# Altium PCB PCB1.PcbDoc
Units mm, origin at the board's own origin, x right, y up, seen from the top; angles counter-clockwise.
Board outline 38 x 55 mm, 2 copper layers (Top Layer, Bottom Layer); 11 components, 17 nets, 82 pads, 237 vias.
Unrouted connection lines stored in the file: 35.
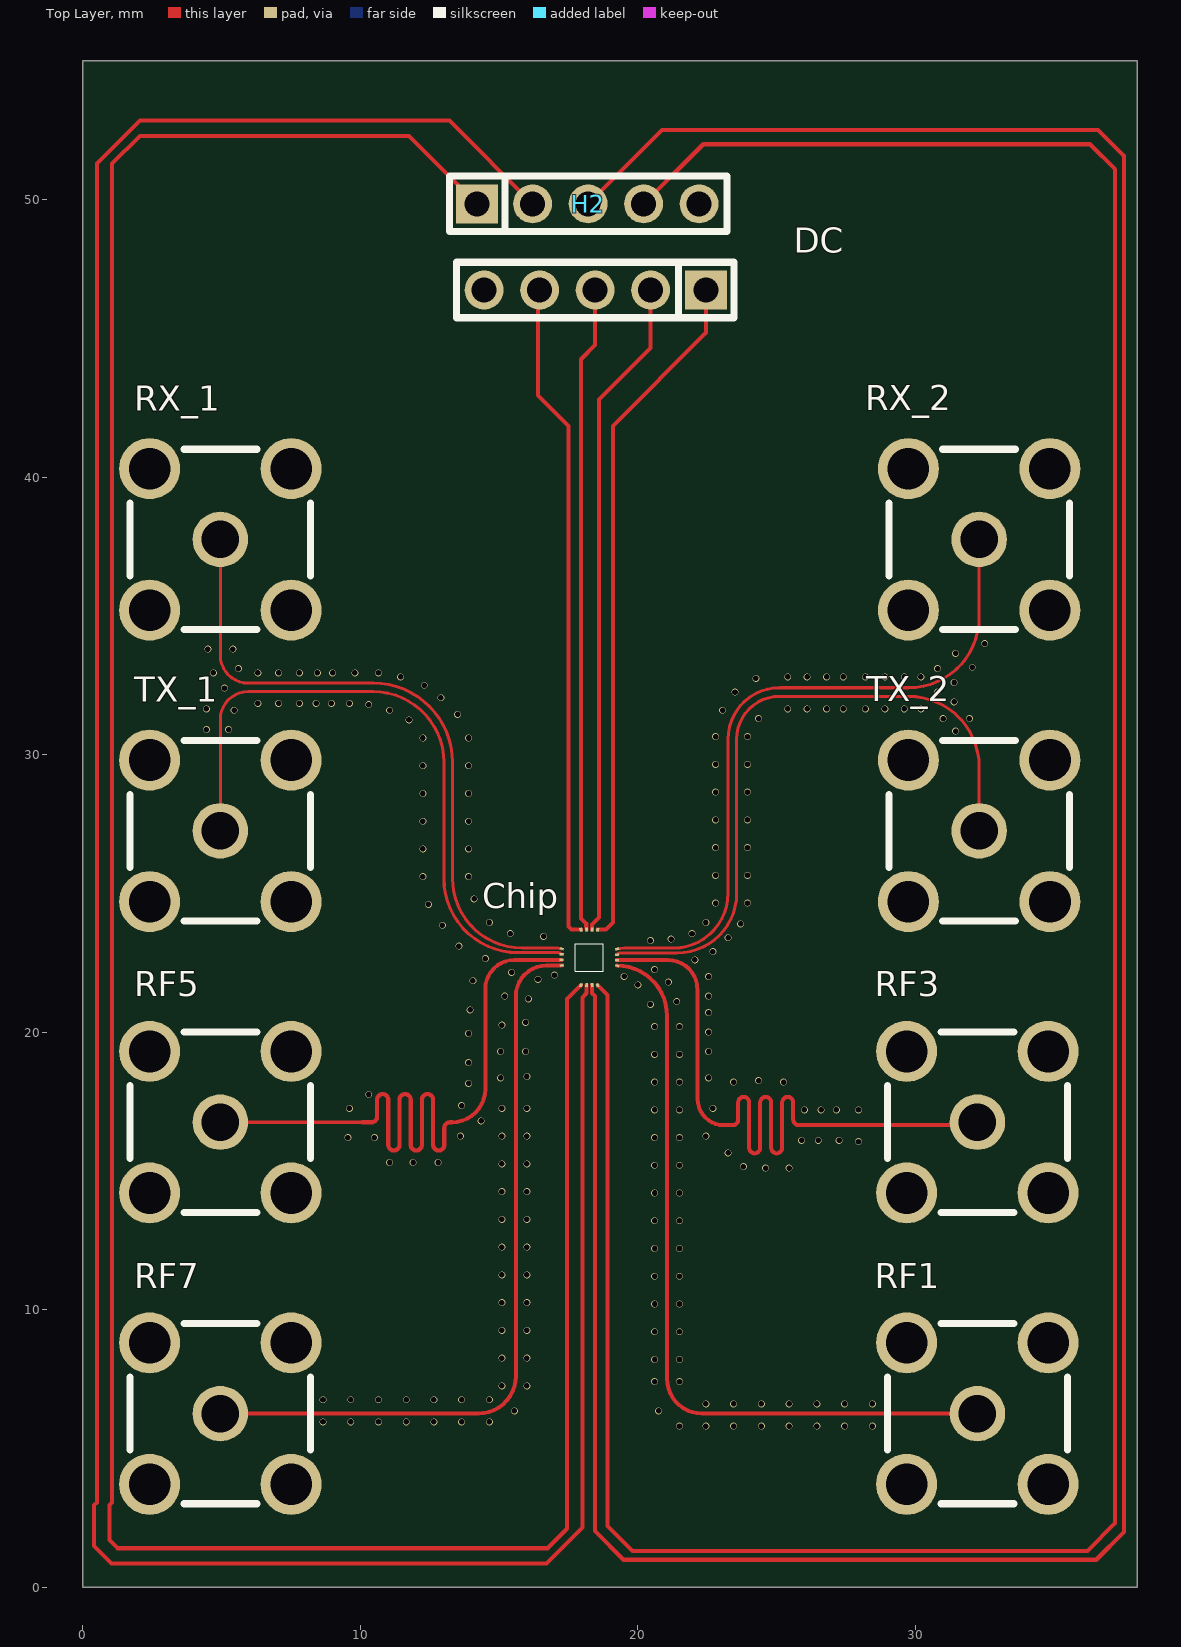
[diagram p0: Top Layer view]
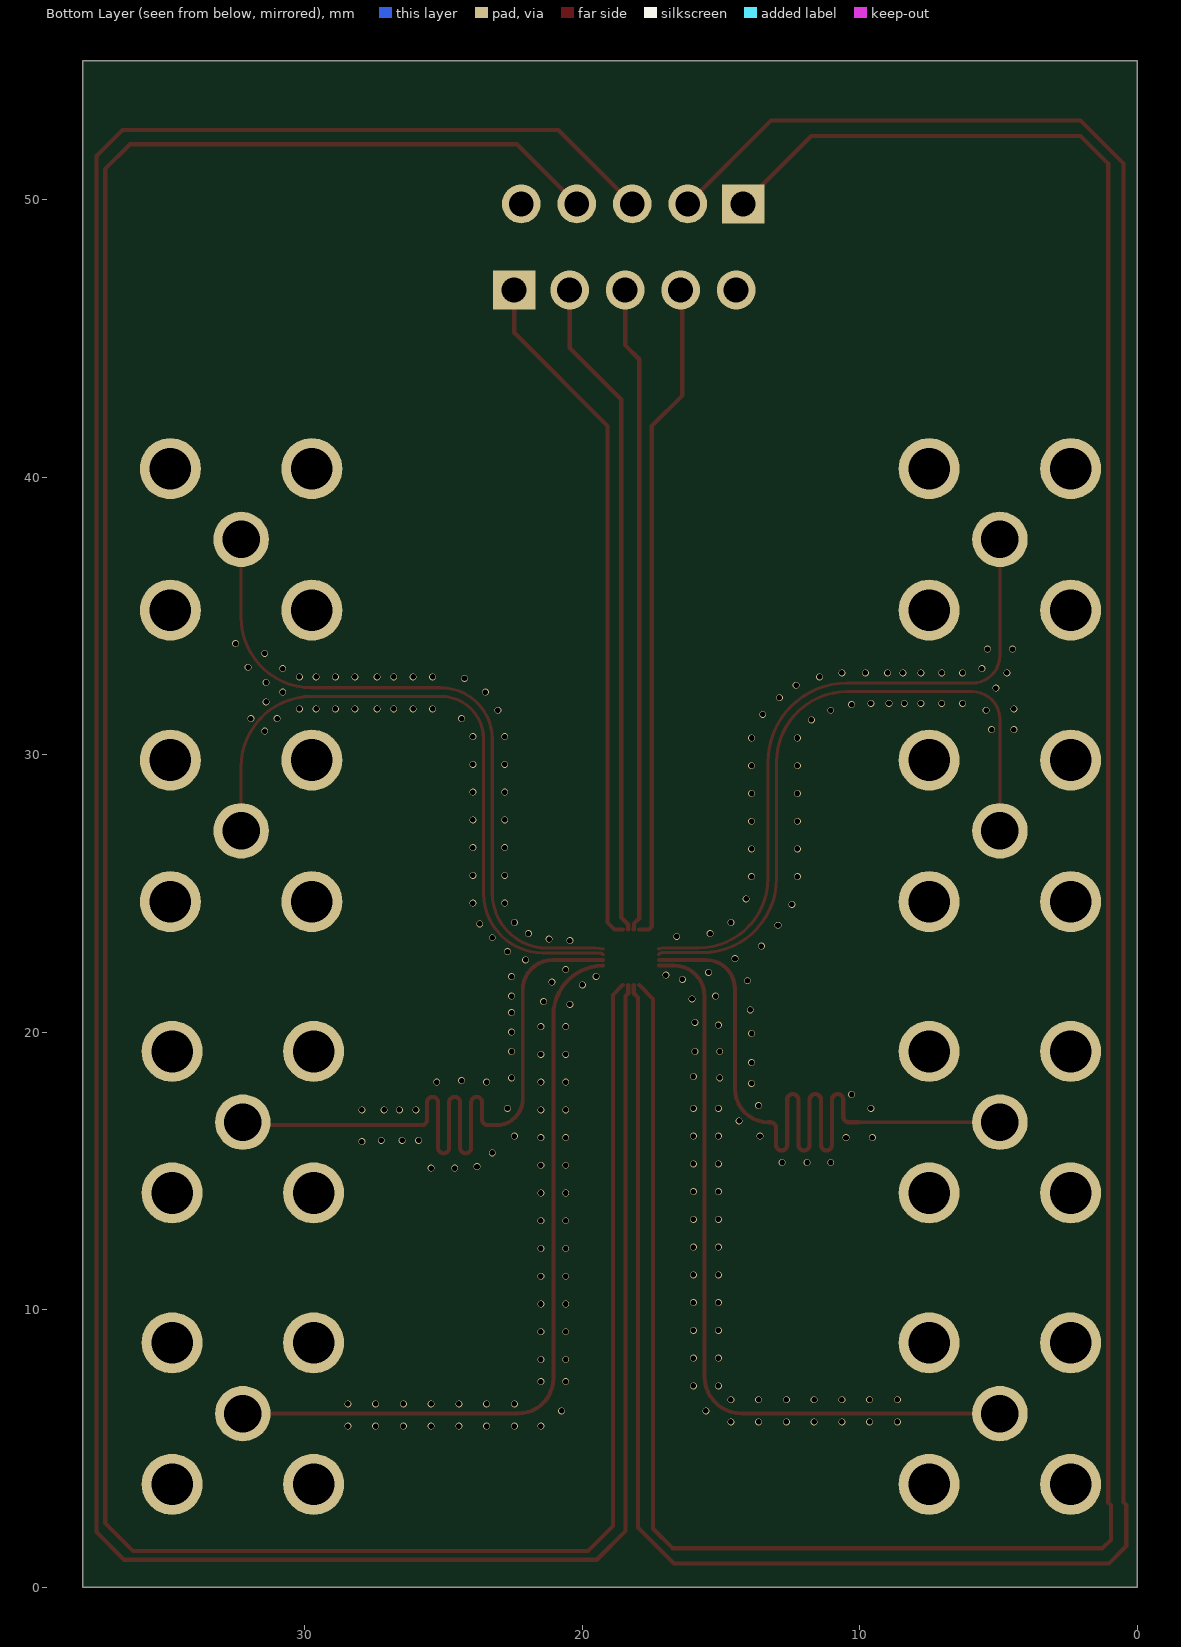
[diagram p1: Bottom Layer view, seen from below]
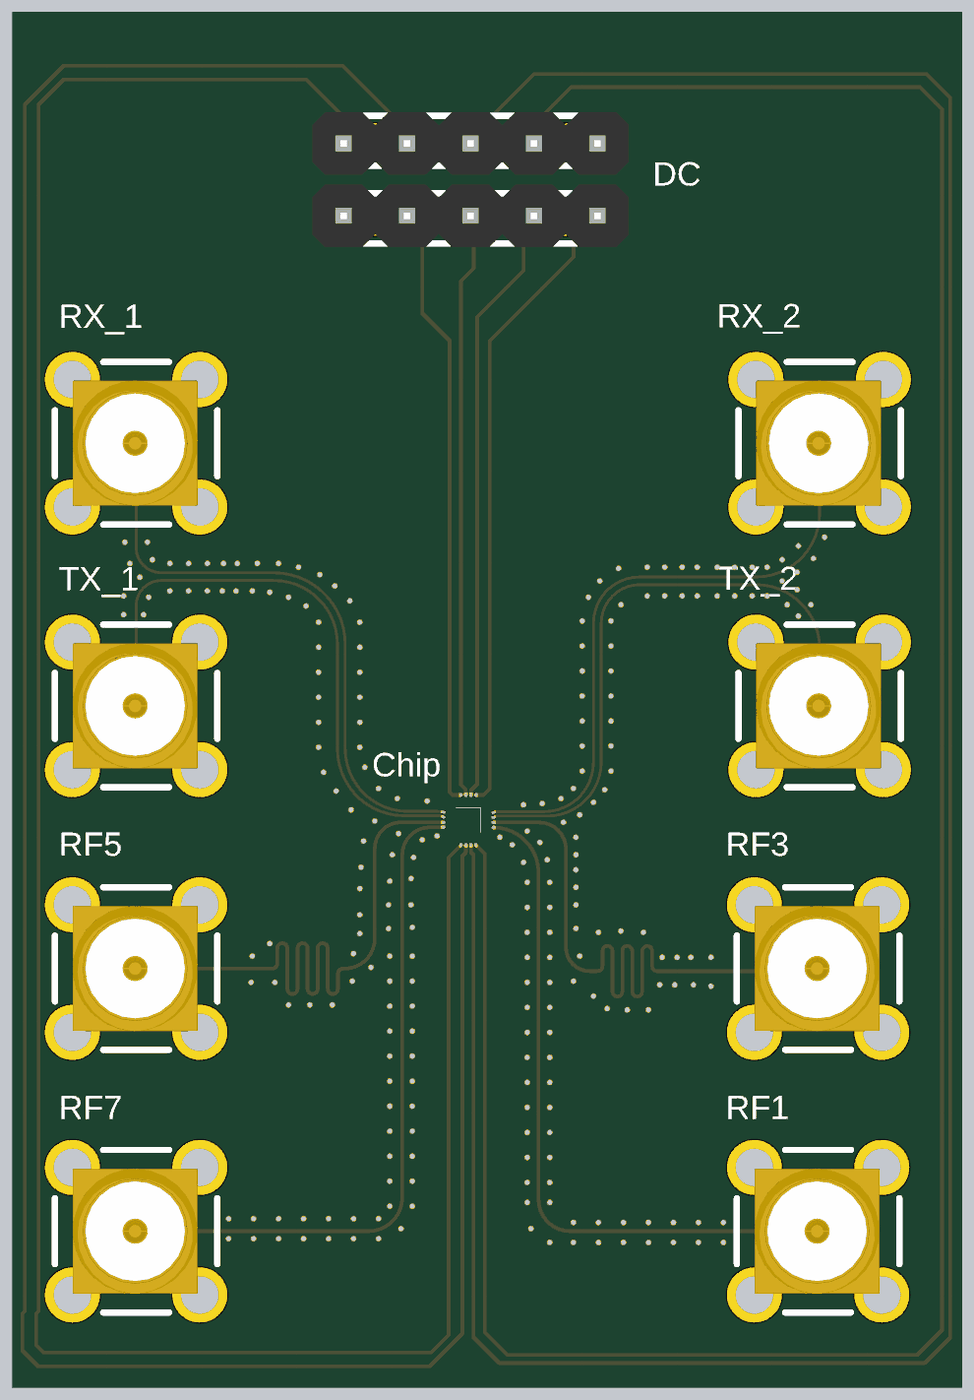
[diagram p2: 3D render of the assembled board from above, using the file's embedded part models]

## Layer stack, top to bottom
Top Solder: solder mask 0.0102, Solder Resist, Dk 3.5
Top Layer: signal copper 0.0356
Dielectric 1: dielectric 0.32, FR-4, Dk 4.8
Bottom Layer: signal copper 0.0356
Bottom Solder: solder mask 0.0102, Solder Resist, Dk 3.5

## Board outline
0,0 0,55 38,55 38,0

## Design rules (kind name [scope] priority, off if disabled: settings)
Clearance [All] p1: gap=0.01 ignorepadtopadclearanceinfootprint=FALSE
DiffPairsRouting [All] p1: maxlimit=0.254 minlimit=0.2 mostfreqgap=0.2 toplayer_minwidth=0.001 toplayer_maxwidth=0.11 toplayer_prefwidth=0.11 bottomlayer_minwidth=0.001 bottomlayer_maxwidth=0.11 bottomlayer_prefwidth=0.11 maxuncoupledlength=12.7
PolygonConnect [All] p1: connectstyle=Relief reliefconductorwidth=0.254 reliefentries=4 polygonreliefangle="90 Angle" airgapwidth=0.254
RoutingVias [All] p1: holewidth=0.2 width=0.25 viastyle="Through Hole" minholewidth=0.2 minwidth=0.25 maxholewidth=0.2 maxwidth=0.25
SolderMaskExpansion [All] p1: expansion=0.102 istentingtop=FALSE
SupplyNets "Schematic Supply Nets" [InNet('GND')] p1: voltage=0.000
Width SMA [InNetClass('SMA')] p1: maxlimit=0.143 minlimit=0.143 preferedwidth=0.143
Width [All] p2: maxlimit=0.15 minlimit=0.15 preferedwidth=0.15
29 further rules are at their usual default settings.

## Classes and differential pairs
net class SMA: R5 R6 R7 R8
differential pair R2: +R2_P -R2_N
differential pair R1: +R1_P -R1_N

## Components (designator, comment, footprint, x,y, rotation, side; value= is the part's Value field where it differs from the comment)
Chip "chip1" chip1 17.749,22.193 r0 top (schematic designator U1)
DC "PZ200V-11-05P" HDR-TH_5P-P2.00-V-M 18.458,46.746 r180 top (schematic designator H1)
H2 "PZ200V-11-05P" HDR-TH_5P-P2.00-V-M 18.204,49.85 r0 top
RF1 "BWSMA-KE-Z001" SMA-TH_BWSMA-KE-Z001 32.238,6.251 r0 top
RF3 "BWSMA-KE-Z001" SMA-TH_BWSMA-KE-Z001 32.238,16.753 r0 top
RF5 "BWSMA-KE-Z001" SMA-TH_BWSMA-KE-Z001 4.951,16.753 r0 top
RF7 "BWSMA-KE-Z001" SMA-TH_BWSMA-KE-Z001 4.951,6.251 r0 top
RX_1 "BWSMA-KE-Z001" SMA-TH_BWSMA-KE-Z001 4.951,37.757 r0 top (schematic designator RF2)
RX_2 "BWSMA-KE-Z001" SMA-TH_BWSMA-KE-Z001 32.3,37.757 r0 top (schematic designator RF6)
TX_1 "BWSMA-KE-Z001" SMA-TH_BWSMA-KE-Z001 4.951,27.255 r0 top (schematic designator RF4)
TX_2 "BWSMA-KE-Z001" SMA-TH_BWSMA-KE-Z001 32.3,27.255 r0 top (schematic designator RF8)

## Footprints (in the part's own frame and the unit in brackets; to place one, negate y for a bottom-side part, rotate by r counter-clockwise, add the part's x,y. Pads: shape width x height; smd on the part's side, far side on the other; paste and mask are expansions set on the pad)
chip1 [mm]
  rect 0.15x0.1 smd rot 164.92 mask-2539.97: 1(-0.5,0.81)
  rect 0.1x0.05 on Mech16 mask+0.102: 1(0.1,0.65) 2(0.1,0.55) 3(0.1,0.45) 4(0.1,0.35) 9(0.9,0.35) 10(0.9,0.45) 11(0.9,0.55) 12(0.9,0.65)
  rect 0.15x0.1 smd rot 174.78 mask-2539.97: 2(-0.5,0.61)
  rect 0.15x0.1 smd rot 4.63 mask-2539.97: 3(-0.5,0.41)
  rect 0.15x0.1 smd rot 14.13 mask-2539.97: 4(-0.5,0.21)
  rect 0.15x0.1 smd rot 76.12 mask-2539.97: 5(0.2,-0.5)
  rect 0.05x0.1 on Mech16 mask+0.102: 5(0.35,0.1) 6(0.45,0.1) 7(0.55,0.1) 8(0.65,0.1) 13(0.65,0.9) 14(0.55,0.9) 15(0.45,0.9) 16(0.35,0.9)
  rect 0.15x0.1 smd rot 85.75 mask-2539.97: 6(0.4,-0.5)
  rect 0.15x0.1 smd rot 94.23 mask-2539.97: 7(0.6,-0.5)
  rect 0.15x0.1 smd rot 104.34 mask-2539.97: 8(0.8,-0.5)
  rect 0.15x0.1 smd rot 166.23 mask-2539.97: 9(1.5,0.2)
  rect 0.15x0.1 smd rot 175.83 mask-2539.97: 10(1.5,0.4)
  rect 0.15x0.1 smd rot 4.15 mask-2539.97: 11(1.5,0.6)
  rect 0.15x0.1 smd rot 14.53 mask-2539.97: 12(1.5,0.8)
  rect 0.15x0.1 smd rot 75.7 mask-2539.97: 13(0.8,1.5)
  rect 0.15x0.1 smd rot 84.63 mask-2539.97: 14(0.6,1.5)
  rect 0.15x0.1 smd rot 94.92 mask-2539.97: 15(0.4,1.5)
  rect 0.15x0.1 smd rot 104.3 mask-2539.97: 16(0.2,1.5)
  silkscreen extent 0,0 1,1, body extent 0,0 1,1, height 0.05
HDR-TH_5P-P2.00-V-M [mm]
  rect 1.524x1.4 hole 0.9 paste-2539.97 mask+0.051: 1(-4,0)
  round 1.4 hole 0.9 paste-2539.97 mask+0.051: 2(-2,0) 3(0,0) 4(2,0) 5(4,0)
  silkscreen extent -5,-1 5,1, body extent -6.2,-1.36 6.46,1.14, height 8.6
SMA-TH_BWSMA-KE-Z001 [mm]
  round 2.2 hole 1.5 paste-2539.97 mask+0.051: 1(-2.55,-2.55) 2(-2.55,2.55) 3(2.55,2.55)
  round 2.2 hole 1.5 copper offset 0,0 paste-2539.97 mask+0.051: 4(2.55,-2.55)
  round 2 hole 1.35 paste-2539.97 mask+0.051: 5(0,0)
  silkscreen extent -3.25,-3.25 3.25,3.25, body extent -2.54,-2.5 2.46,2.5, height 8

## Part data
DC H2: Color=Black, Current Rating (Max)=-, JLCPCB Part Class="Extended Part", LCSC Part Name="间距:2mm 1x5P 直插 方针", Manufacturer=XFCN(兴飞), Operating Temperature Range=-40℃~+105℃, Add into BOM=yes, Circluar Pins/Square Pins="Square Pins", Contact Plating=-, Convert to PCB=yes, Datasheet=https://atta.szlcsc.com/upload/public/pdf/source/20200518/C541858_7610F54454E936EFCDE06B655DF7C837.pdf, Device=PZ200V-11-05P, Insulation Height=2mm, Length of End Connection Pin=2.8mm, Length of Mating Pin=3.9mm, Manufacturer Part=PZ200V-11-05P, Mounting Type=Straight, Number of Pins=5P, Number of Rows=Plugin, Pin Structure=1x5P, Pitch=2mm, Row Spacing=-, Soldering Temperature(Max)=-, Supplier=LCSC, Supplier Footprint=插件,P=2mm, Supplier Part=C541859, Symbol=PZ200V-11-05P, Voltage Rating (Max)=-
RF1 RF3 RF5 RF7 RX_1 RX_2 TX_1 TX_2: library part BWSMA-KE-Z001_C496549, Frequency-Max=-, JLCPCB Part Class="Extended Part", LCSC Part Name="内孔 SMA 正脚", Manufacturer="BAT WIRELESS(蝙蝠无线)", Operating Temperature Range=-65℃~+165℃, Add into BOM=yes, Connector Type=板端, Contact Material=-, Contact Plating=-, Convert to PCB=yes, Datasheet=https://atta.szlcsc.com/upload/public/pdf/source/20221228/40BF41E56A06003A0210E1785CA66EA6.pdf, Device=BWSMA-KE-Z001_C496549, Impedance=50Ω, Interface Diameter=-, Interface Length/Height=-, Interface Type=内孔, Manufacturer Part=BWSMA-KE-Z001, Number of Ports=1, RF Series=SMA, Soldering Temperature(Max)=-, Style=正脚, Supplier=LCSC, Supplier Footprint=插件, Supplier Part=C496549, Symbol=BWSMA-KE-Z001

## Via types
v1: diameter 0.25, hole 0.2, Top Layer to Bottom Layer, tented both sides, 237 vias

## Nets (pads, with @x,y where several pads share a name; then routed paths per layer and width w, separated by ;. In a path a pad name is that pad's centre, name@x,y a point inside that pad or via, vN(x,y) a via of type N, cw(c..) or ccw(c..) an arc to the next point about the centre after c; other vN are vias at no path point)
GND: RF1.1 RF1.2 RF1.3 RF1.4 RF3.1 RF3.2 RF3.3 RF3.4 RF5.1 RF5.2 RF5.3 RF5.4 RF7.1 RF7.2 RF7.3 RF7.4 RX_1.1 RX_1.2 RX_1.3 RX_1.4 RX_2.1 RX_2.2 RX_2.3 RX_2.4 TX_1.1 TX_1.2 TX_1.3 TX_1.4 TX_2.1 TX_2.2 TX_2.3 TX_2.4
NetH1_1: Chip.13 DC.1 | length 24.9
  Top Layer w0.15: Chip.13@18.549,23.693 18.843,23.693 19.1,23.95 19.1,41.85 22.458,45.208 DC.1 DC.1@22.4,46.688
NetH1_2: Chip.14 DC.2 | length 23.9
  Top Layer w0.15: Chip.14@18.349,23.693 18.349,23.874 18.6,24.125 18.6,42.8 20.458,44.658 DC.2 DC.2@20.45,46.738
NetH1_3: Chip.15 DC.3 | length 23.3
  Top Layer w0.15: Chip.15@18.149,23.693 18.136,23.842 18.136,23.914 17.95,24.1 17.95,44.25 18.458,44.758 DC.3
NetH1_4: Chip.16 DC.4 | length 23.9
  Top Layer w0.15: DC.4 16.4,46.688 16.4,42.95 17.5,41.85 17.5,23.8 17.607,23.693 Chip.16@17.949,23.693
NetH2_1: Chip.5 H2.1 | length 101
  Top Layer w0.15: H2.1 14.142,49.85 13.517,50.475 13.517,50.537 11.754,52.3 2.05,52.3 1.05,51.3 1.05,3.05 0.95,2.95 0.95,1.7 1.25,1.4 16.75,1.4 17.45,2.1 17.45,21.194 Chip.5@17.949,21.693
NetH2_2: Chip.6 H2.2 | length 105.5
  Top Layer w0.15: H2.2 13.204,52.85 2.05,52.85 0.5,51.3 0.5,3.05 0.4,2.95 0.4,1.472 1.022,0.85 16.7,0.85 18,2.15 18,21.25 18.149,21.399 Chip.6@18.149,21.693
NetH2_3: Chip.7 H2.3 | length 110
  Top Layer w0.15: H2.3 20.872,52.518 36.582,52.518 37.518,51.582 37.518,1.982 36.518,0.982 19.482,0.982 18.45,2.014 18.45,21.3 18.349,21.401 Chip.7@18.349,21.693
NetH2_4: Chip.8 H2.4 | length 105.8
  Top Layer w0.15: Chip.8@18.549,21.693 18.9,21.342 18.9,2.2 19.8,1.3 36.2,1.3 37.2,2.3 37.2,51.1 36.3,52 22.354,52 H2.4
R1_N: Chip.2 TX_1.5 | length 24.1
  Top Layer w0.11: TX_1.5 4.951,31.27 cw(c5.949,31.27) 5.949,32.268 10.465,32.268 cw(c10.465,29.728) 13.005,29.728 13.005,25.537 ccw(c15.679,25.537) 15.679,22.863 17.121,22.863 cw(c17.121,22.697) Chip.2@17.249,22.803
R1_P: Chip.1 RX_1.5 | length 24.3
  Top Layer w0.11: RX_1.5 4.951,33.576 ccw(c5.949,33.576) 5.949,32.578 10.465,32.578 cw(c10.465,29.728) 13.315,29.728 13.315,25.537 ccw(c15.815,25.537) 15.815,23.037 16.993,23.037 cw(c16.993,22.055) Chip.1@17.249,23.003
R2_N: Chip.12 RX_2.5 | length 25.1
  Top Layer w0.11: Chip.12@19.249,22.993 cw(c19.505,22.006) 19.505,23.026 21.276,23.026 ccw(c21.276,25) 23.25,25 23.25,30.56 cw(c25.1,30.56) 25.1,32.41 29.76,32.41 ccw(c29.76,34.95) 32.3,34.95 RX_2.5
R2_P: Chip.11 TX_2.5 | length 24.5
  Top Layer w0.11: Chip.11@19.249,22.793 cw(c19.378,22.682) 19.378,22.852 21.412,22.852 ccw(c21.412,25) 23.56,25 23.56,30.56 cw(c25.1,30.56) 25.1,32.1 29.76,32.1 cw(c29.76,29.56) 32.3,29.56 TX_2.5
R5: Chip.9 RF1.5 | length 27.8
  Top Layer w0.143: Chip.9@19.249,22.393 cw(c19.249,20.592) 21.05,20.592 21.05,7.515 ccw(c22.314,7.515) 22.314,6.251 RF1.5
R6: Chip.10 RF3.5 | length 27.3
  Top Layer w0.143: Chip.10@19.249,22.593 21.085,22.593 cw(c21.085,21.528) 22.15,21.528 22.15,17.591 ccw(c23.094,17.591) 23.094,16.647 23.344,16.647 23.415,16.647 ccw(c23.415,16.845) 23.614,16.845 23.614,17.465 cw(c23.812,17.465) 23.812,17.663 cw(c23.812,17.465) 24.01,17.465 24.01,15.829 ccw(c24.209,15.829) 24.209,15.631 ccw(c24.209,15.829) 24.407,15.829 24.407,17.465 cw(c24.605,17.465) 24.605,17.663 cw(c24.605,17.465) 24.804,17.465 24.804,15.829 ccw(c25.002,15.829) 25.002,15.631 ccw(c25.002,15.829) 25.201,15.829 25.201,17.465 cw(c25.399,17.465) 25.399,17.663 cw(c25.399,17.465) 25.597,17.465 25.597,16.845 ccw(c25.796,16.845) 25.796,16.647 26.265,16.647 32.132,16.647 ccw(c32.132,16.753) RF3.5
R7: Chip.3 RF5.5 | length 28.2
  Top Layer w0.143: RF5.5 4.951,16.75 10.073,16.75 ; 13.3,16.75 ccw(c13.3,17.95) 14.5,17.95 14.5,21.55 cw(c15.553,21.55) 15.553,22.603 Chip.3@17.249,22.603
  Top Layer w0.15: 10.073,16.75 10.397,16.75 ccw(c10.397,16.952) 10.599,16.952 10.599,17.564 cw(c10.801,17.564) 10.801,17.766 cw(c10.801,17.564) 11.003,17.564 11.003,15.936 ccw(c11.205,15.936) 11.205,15.734 ccw(c11.205,15.936) 11.407,15.936 11.407,17.564 cw(c11.609,17.564) 11.609,17.766 cw(c11.609,17.564) 11.811,17.564 11.811,15.936 ccw(c12.013,15.936) 12.013,15.734 ccw(c12.013,15.936) 12.215,15.936 12.215,17.564 cw(c12.417,17.564) 12.417,17.766 cw(c12.417,17.564) 12.619,17.564 12.619,15.936 ccw(c12.821,15.936) 12.821,15.734 ccw(c12.821,15.936) 13.023,15.936 13.023,16.548 cw(c13.225,16.548) 13.225,16.75 13.3,16.75
R8: Chip.4 RF7.5 | length 27.4
  Top Layer w0.143: RF7.5 14.251,6.251 ccw(c14.251,7.6) 15.6,7.6 15.6,21.3 cw(c16.7,21.3) 16.7,22.4 17.249,22.4 Chip.4@17.249,22.403
pads on no net: DC.5 H2.5
copper on no net:
  other v1: 21.5,5.8 22.45,5.8 23.45,5.8 24.45,5.8 25.45,5.8 26.45,5.8 27.45,5.8 28.45,5.8 8.65,5.95 9.65,5.95 10.65,5.95 11.65,5.95 12.65,5.95 13.65,5.95 14.65,5.95 15.55,6.35 20.75,6.35 22.45,6.6 23.45,6.6 24.45,6.6 25.45,6.6 26.45,6.6 27.45,6.6 28.45,6.6 8.65,6.75 9.65,6.75 10.65,6.75 11.65,6.75 12.65,6.75 13.65,6.75 14.65,6.75 15.1,7.25 16,7.25 20.6,7.4 21.5,7.4 20.6,8.2 21.5,8.2 15.1,8.25 16,8.25 20.6,9.2 21.5,9.2 15.1,9.25 16,9.25 20.6,10.2 21.5,10.2 15.1,10.25 16,10.25 20.6,11.2 21.5,11.2 15.1,11.25 16,11.25 20.6,12.2 21.5,12.2 15.1,12.25 16,12.25 20.6,13.2 21.5,13.2 15.1,13.25 16,13.25 20.6,14.2 21.5,14.2 15.1,14.25 16,14.25 24.6,15.1 25.45,15.1 23.8,15.15 20.6,15.2 21.5,15.2 15.1,15.25 16,15.25 11.05,15.3 11.9,15.3 12.8,15.3 23.25,15.65 27.95,16.05 25.9,16.1 26.5,16.1 27.25,16.1 9.55,16.2 10.5,16.2 20.6,16.2 21.5,16.2 13.6,16.25 15.1,16.25 16,16.25 22.45,16.25 14.35,16.8 20.6,17.2 21.5,17.2 26,17.2 26.6,17.2 27.15,17.2 27.95,17.2 9.6,17.25 15.1,17.25 16,17.25 22.7,17.25 13.65,17.35 10.3,17.75 13.9,18.15 20.6,18.2 21.5,18.2 23.45,18.2 25.25,18.2 24.35,18.25 15.05,18.35 22.55,18.35 16,18.4 13.9,18.9 20.6,19.2 21.5,19.2 15.05,19.3 15.95,19.3 22.55,19.3 13.9,19.95 22.55,20 20.6,20.2 21.5,20.2 15.1,20.25 15.95,20.35 22.55,20.7 13.95,20.8 20.45,21 21.4,21.1 16.05,21.2 15.2,21.3 22.55,21.3 20,21.7 21.1,21.8 14.05,21.85 16.4,21.9 19.505,22.006 22.55,22 16.993,22.055 15.45,22.15 20.6,22.25 22.05,22.6 14.5,22.65 22.7,22.9 13.55,23.1 20.45,23.3 21.2,23.35 23.25,23.4 16.6,23.45 15.4,23.55 21.95,23.55 12.95,23.85 23.7,23.9 14.65,23.95 22.45,23.95 12.45,24.6 22.8,24.65 23.95,24.65 14.1,24.8 12.25,25.6 13.9,25.6 22.8,25.65 23.95,25.65 12.25,26.6 13.9,26.6 22.8,26.65 23.95,26.65 12.25,27.6 13.9,27.6 22.8,27.65 23.95,27.65 12.25,28.6 13.9,28.6 22.8,28.65 23.95,28.65 12.25,29.6 13.9,29.6 22.8,29.65 23.95,29.65 12.25,30.6 13.9,30.6 22.8,30.65 23.95,30.65 31.45,30.85 4.45,30.9 5.25,30.9 11.75,31.25 24.35,31.3 31,31.3 31.95,31.3 13.5,31.45 5.45,31.6 11.05,31.6 23.05,31.6 4.45,31.65 25.4,31.65 26.1,31.65 26.8,31.65 27.4,31.65 28.2,31.65 28.9,31.65 29.6,31.65 30.2,31.65 10.3,31.8 6.3,31.85 7.05,31.85 7.8,31.85 8.4,31.85 8.95,31.85 9.6,31.85 31.4,31.9 12.9,32.05 23.5,32.25 30.8,32.25 5.1,32.4 12.3,32.5 31.4,32.6 24.25,32.75 11.45,32.8 25.4,32.8 26.1,32.8 26.8,32.8 27.4,32.8 28.2,32.8 28.9,32.8 29.6,32.8 30.2,32.8 4.7,32.95 6.3,32.95 7.05,32.95 7.8,32.95 8.45,32.95 9,32.95 9.8,32.95 10.65,32.95 5.6,33.1 30.8,33.1 32.05,33.15 31.45,33.65 4.5,33.8 5.4,33.8 32.5,34

## Silkscreen, mask and mechanical layers (free items; w line width, h text height)
Mechanical 1:
  the board outline again, w0.254